# EAGLE board schema_v1 (EAGLE 7.6.0)
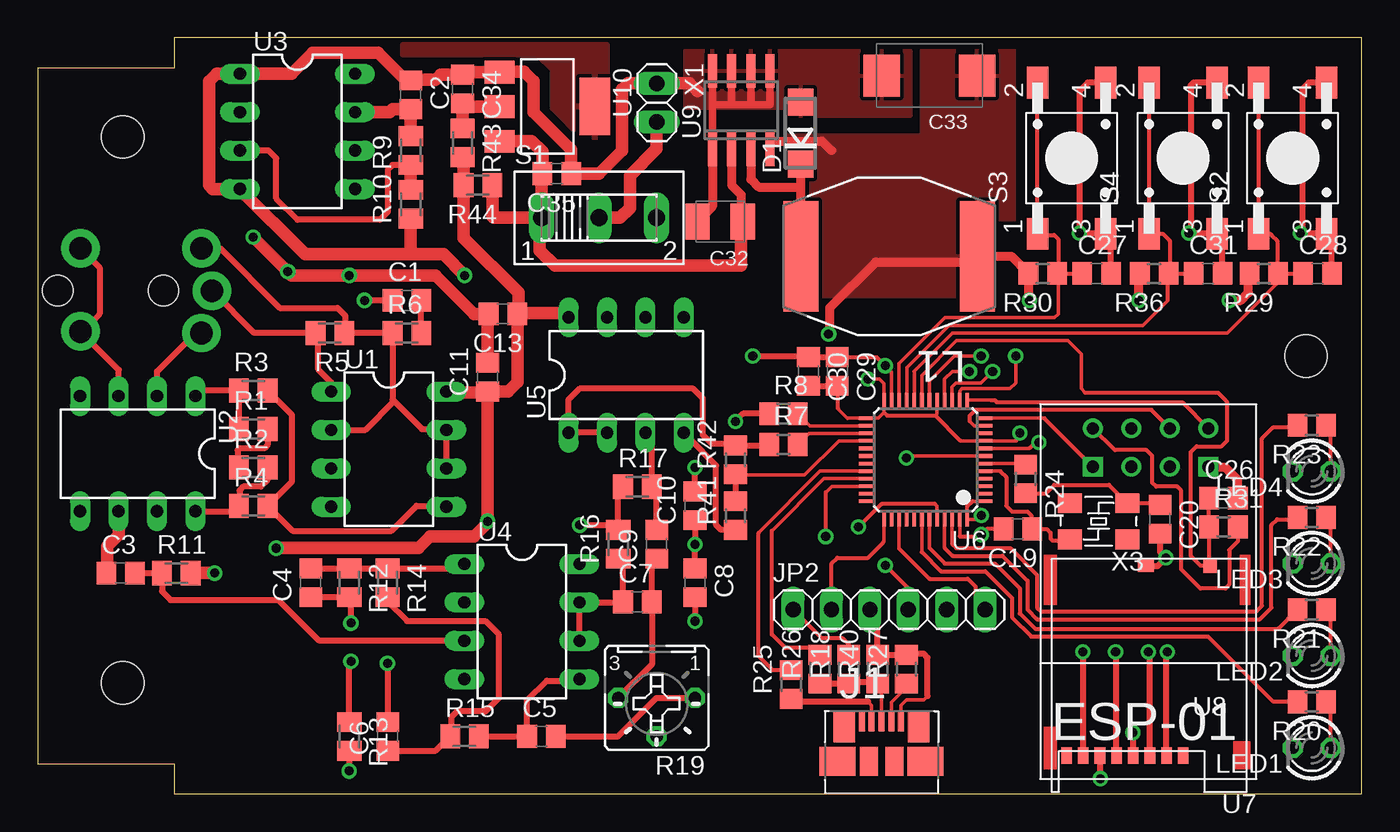
[diagram p0: board, top side]
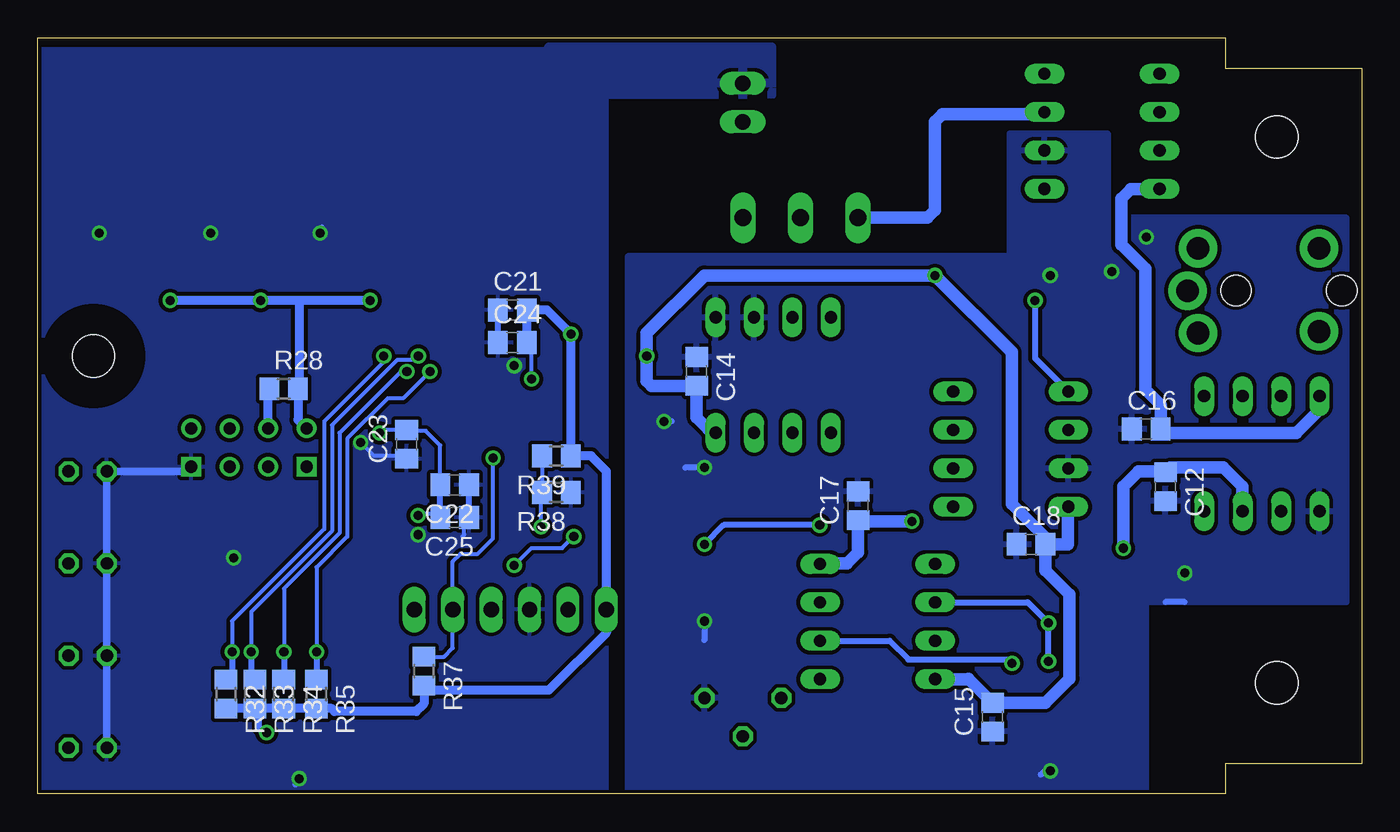
[diagram p1: board, bottom side, seen from below]

Size 87.52 x 50 mm. Coordinates in mm from the lower left corner, seen from the top.
Outline: 0,2 9,2 9,0 87.52,0 87.52,50 9,50 9,48 0,48 0,2
Copper layers (1*16): Top 0.035mm / dielectric 1.5mm / Bottom 0.035mm
Design rules "default *": minimum track width 9mil, minimum drill 6mil, track to track 10mil, track to pad 10mil, pad to pad 10mil, via to via 10mil, smd to smd 10mil, copper to edge 10mil, drill to drill 8mil, minimum pad ring 10mil, minimum via ring 8mil, stop-mask expansion 4mil, vias tented up to drill 0mil, thermal gap 10mil
Holes 2.8 mm at 5.62,43.45 5.62,7.35 83.84,28.96
bRestrict: area 80.8,25.9 to 86.9,32

## Footprints (pad centres in the part's own frame; a part is rotated, then mirrored left to right if it is on the bottom)
C0805 = smd 1.3 x 1.5: 1 -0.95,0; 2 0.95,0
SMC_B = smd 1.6 x 2.4: + -1.5,0; - 1.5,0
SMC_E = smd 2.4 x 2.8: + -3.15,0; - 3.15,0
DO214AC = smd 1.8 x 1.7: A 2.05,0; C -2.05,0
MOLEX_47346-0001 = smd 0.395 x 1.38: 1 -1.3,0; 2 -0.65,0; 3 0,0; 4 0.65,0; 5 1.3,0 | smd 1.4 x 2.1: M1 -2.462,-0.36; M2 2.462,-0.36 | smd 2.375 x 1.9: M3 -2.913,-2.66; M6 2.913,-2.66 | smd 1.175 x 1.9: M4 -0.82,-2.66; M5 0.85,-2.66
1X06 = drill 1.016 long: 1 -6.35,0; 2 -3.81,0; 3 -1.27,0; 4 1.27,0; 5 3.81,0; 6 6.35,0
INDM1410X600N = smd 2.311 x 7.29: 1 -5.842,0; 2 5.842,0
LED3MM = drill 0.813 octagon: A -1.27,0; K 1.27,0
M0805 = smd 1.3 x 1.6: 1 -0.95,0; 2 0.95,0
R0805 = smd 1.3 x 1.5: 1 -0.95,0; 2 0.95,0
B25P = drill 0.813 octagon: A -2.54,0; E 2.54,0; S 0,2.54
255SB = drill 1.118 long: 1 -3.81,0; 2 0,0; 3 3.81,0
TASTER-9314_SMD = smd 2.1 x 1.4: 1 -5,2.25; 2 5,2.25; 3 -5,-2.25; 4 5,-2.25
DIL08 = drill 0.813 long: 1 -3.81,-3.81; 2 -1.27,-3.81; 3 1.27,-3.81; 4 3.81,-3.81; 5 3.81,3.81; 6 1.27,3.81; 7 -1.27,3.81; 8 -3.81,3.81
LQFP48-7X7 = smd 0.9 x 0.24: 1 -3.95,2.75; 2 -3.95,2.25; 3 -3.95,1.75; 4 -3.95,1.25; 5 -3.95,0.75; 6 -3.95,0.25; 7 -3.95,-0.25; 8 -3.95,-0.75; 9 -3.95,-1.25; 10 -3.95,-1.75; 11 -3.95,-2.25; 12 -3.95,-2.75; 25 3.95,-2.75; 26 3.95,-2.25; 27 3.95,-1.75; 28 3.95,-1.25; 29 3.95,-0.75; 30 3.95,-0.25; 31 3.95,0.25; 32 3.95,0.75; 33 3.95,1.25; 34 3.95,1.75; 35 3.95,2.25; 36 3.95,2.75 | smd 0.24 x 0.9: 13 -2.75,-3.95; 14 -2.25,-3.95; 15 -1.75,-3.95; 16 -1.25,-3.95; 17 -0.75,-3.95; 18 -0.25,-3.95; 19 0.25,-3.95; 20 0.75,-3.95; 21 1.25,-3.95; 22 1.75,-3.95; 23 2.25,-3.95; 24 2.75,-3.95; 37 2.75,3.95; 38 2.25,3.95; 39 1.75,3.95; 40 1.25,3.95; 41 0.75,3.95; 42 0.25,3.95; 43 -0.25,3.95; 44 -0.75,3.95; 45 -1.25,3.95; 46 -1.75,3.95; 47 -2.25,3.95; 48 -2.75,3.95
ESP01 = drill 0.8: CH_PD -1.285,-8.178; GPIO0 1.255,-5.638; GPIO2 -1.285,-5.638; RST 1.255,-8.178; TX -3.825,-8.178; VCC 3.795,-8.178 | drill 0.8 square: GND -3.825,-5.638; RX 3.795,-5.638
SD-503398-003 = smd 0.7 x 1.1: 1 0,0; 2 1.1,0; 3 2.2,0; 4 3.3,0; 5 4.4,0; 6 5.5,0; 7 6.6,0; 8 7.7,0 | smd 0.9 x 0.93: 9 -1.79,-12.55 | smd 1.05 x 0.78: 10 2.45,-12.54
SOIC8 = smd 0.6 x 2.2: 1 -1.905,-2.6; 2 -0.635,-2.6; 3 0.635,-2.6; 4 1.905,-2.6; 5 1.905,2.6; 6 0.635,2.6; 7 -0.635,2.6; 8 -1.905,2.6
SOT223 = smd 1.499 x 2.007: 1 -2.261,-3.15; 2 0.025,-3.15; 3 2.311,-3.15 | smd 3.81 x 2.007: 4 0,3.15
1X02 = drill 1.016 long: 1 -1.27,0; 2 1.27,0
MJ-2135 = drill 1.5 pad 2.54: P$1 8.7,2.8; P$2 8,5.6; P$3 8,0; P$4 0,0.1; P$5 0,5.6 | hole 2: 5.5,2.8; -1.5,2.8
IQG5032B = smd 1.6 x 1.3: 1 -1.9,-1.2; 2 1.9,-1.2; 3 1.9,1.2; 4 -1.9,1.2

## Placement (x,y rotation side)
C1  10n  [C0805]  24.4,32.64 0 top
C2  1u  [C0805]  24.65,46.23 270 top
C3  1u  [C0805]  5.48,14.61 0 top
C4  10n  [C0805]  18.05,13.97 90 top
C5  10n  [C0805]  33.29,3.81 0 top
C6  10n  [C0805]  23.13,3.81 90 top
C7  47n  [C0805]  39.64,12.7 0 top
C8  47n  [C0805]  43.45,13.97 270 top
C9  47n  [C0805]  40.91,16.51 90 top
C10  47n  [C0805]  43.45,19.05 90 top
C11  100n  [C0805]  29.73,27.56 90 top
C12  100n  [C0805]  12.97,20.32 270 bottom
C13  100n  [C0805]  30.75,31.75 180 top
C14  100n  [C0805]  43.96,27.94 270 bottom
C15  100n  [C0805]  24.4,5.08 90 bottom
C16  100n  [C0805]  14.24,24.13 0 bottom
C17  100n  [C0805]  33.29,19.05 90 bottom
C18  100n  [C0805]  21.86,16.51 0 bottom
C19  22p  [C0805]  64.79,17.53 180 top
C20  22p  [C0805]  74.18,18.16 270 top
C21  100n  [C0805]  56.15,32 0 bottom
C22  100n  [C0805]  59.96,20.45 180 bottom
C23  100n  [C0805]  63.13,23.11 90 bottom
C24  4.7u  [C0805]  56.15,29.84 0 bottom
C25  4.7u  [C0805]  59.96,18.29 180 bottom
C26  100n  [C0805]  78.38,19.56 0 top
C27  100n  [C0805]  69.99,34.42 0 top
C28  100n  [C0805]  84.6,34.42 0 top
C29  1u  [C0805]  52.85,27.94 270 top
C30  10n  [C0805]  50.94,27.94 270 top
C31  100n  [C0805]  77.36,34.42 0 top
C32  15u  [SMC_B]  45.1,37.85 180 top
C33  220u  [SMC_E]  58.94,47.5 180 top
C34  1u  [C0805]  28.08,46.61 270 top
C35  1u  [C0805]  34.31,41.02 180 top
D1  [DO214AC]  50.44,43.69 90 top
J1  [MOLEX_47346-0001]  55.77,4.83 0 top
JP2  [1X06]  56.28,12.19 0 top
L1  68µH  [INDM1410X600N]  56.28,35.56 180 top
LED1  [LED3MM]  84.22,3.05 180 top
LED2  [LED3MM]  84.22,9.14 180 top
LED3  [LED3MM]  84.22,15.24 180 top
LED4  [LED3MM]  84.22,21.34 180 top
R1  3k  [M0805]  14.24,24.13 0 top
R2  3k  [M0805]  14.24,21.59 0 top
R3  30k  [M0805]  14.24,26.67 0 top
R4  30k  [M0805]  14.24,19.05 0 top
R5  1M  [M0805]  19.32,30.48 180 top
R6  12k  [M0805]  24.4,30.48 0 top
R7  0  [R0805]  49.29,23.11 0 top
R8  0  [R0805]  49.29,25.15 0 top
R9  100k  [M0805]  24.65,42.55 90 top
R10  100k  [M0805]  24.65,38.99 90 top
R11  1M  [M0805]  9.16,14.61 0 top
R12  68k  [M0805]  20.59,13.97 270 top
R13  1k  [M0805]  20.59,3.81 270 top
R14  39k  [M0805]  23.13,13.97 270 top
R15  100k  [M0805]  28.21,3.81 0 top
R16  68k  [M0805]  38.37,16.51 90 top
R17  68k  [M0805]  39.64,20.32 0 top
R18  1.5k  [R0805]  53.61,8.26 90 top
R19  [B25P]  40.91,6.35 180 top
R20  [R0805]  84.22,6.1 180 top
R21  [R0805]  84.22,12.19 180 top
R22  [R0805]  84.22,18.29 180 top
R23  [R0805]  84.22,24.38 180 top
R24  0E  [R0805]  65.29,20.83 270 top
R25  22E  [R0805]  49.8,7.24 90 top
R26  22E  [R0805]  51.7,8.26 90 top
R27  100k  [R0805]  57.42,8.26 90 top
R28  10k  [R0805]  71.26,26.8 0 bottom
R29  10k  [R0805]  81.04,34.42 180 top
R30  10k  [R0805]  66.44,34.42 180 top
R31  10k  [R0805]  78.38,17.65 0 top
R32  10k  [R0805]  75.07,6.6 270 bottom
R33  10k  [R0805]  73.17,6.6 270 bottom
R34  10k  [R0805]  71.26,6.6 270 bottom
R35  10k  [R0805]  69.1,6.6 270 bottom
R36  10k  [R0805]  73.8,34.42 180 top
R37  10k  [R0805]  61.99,8.13 270 bottom
R38  10k  [R0805]  53.23,19.94 180 bottom
R39  10k  [R0805]  53.23,22.35 180 bottom
R40  1.5k  [R0805]  55.52,8.26 90 top
R41  3.3k  [R0805]  46.12,18.41 90 top
R42  6.8k  [R0805]  46.12,22.1 90 top
R43  0  [M0805]  28.08,43.05 270 top
R44  0  [M0805]  29.1,40.26 180 top
S1  [255SB]  37.1,38.1 0 top
S2  [TASTER-9314_SMD]  82.95,42.04 90 top
S3  [TASTER-9314_SMD]  68.34,42.04 90 top
S4  [TASTER-9314_SMD]  75.71,42.04 90 top
U1  LT1112N  [DIL08]  23.2,22.8 270 top
U2  LT1167A  [DIL08]  6.6,22.5 180 top
U3  BUF634PDIL08  [DIL08]  17.16,43.81 270 top
U4  LT1112N  [DIL08]  32,11.4 270 top
U5  LT1112N  [DIL08]  38.9,27.7 0 top
U6  STM32F373CCT6LQFP48-7X7  [LQFP48-7X7]  58.69,22.1 180 top
U7  ESP01  [ESP01]  73.55,16 180 top
U8  MICROSD  [SD-503398-003]  75.71,2.54 180 top
U9  MIC4680-3.3YM  [SOIC8]  46.5,45.21 0 top
U10  REG1117  [SOT223]  33.67,45.47 270 top
X1  [1X02]  40.91,45.72 270 top
X2  MJ2135  [MJ-2135]  2.81,30.48 0 top
X3  ABM3B  [IQG5032B]  70.12,18.03 180 top

## Library data of the parts
C1-C31 C34 C35 R1-R18 R20-R44 = resistor
C32 C33 = rcl
D1 = diode
J1 = pro3E; MPN: 47346-0001; OC_FARNELL: 1568026; OC_NEWARK: 47M0505; PACKAGE: 5 POS MICRO USB R/A; SUPPLIER: MOLEX
JP2 = pinhead
L1 = pro3E; CURRENTRATING: 1.5A; MPN: UP2B-680-R; OC_FARNELL: 1463537; OC_NEWARK: 29K6281; PACKAGE: SMD; SUPPLIER: Coiltronics; TOLERANCE: ±20%
LED1-LED4 = led
R19 = pot
S1 = switch
S2-S4 U1-U6 U8 X1-X3 = pro3E
U7 = esp8266modules
U9 = pro3E; MF: MICROCHIP; MPN: MIC4680-3.3YM; OC_FARNELL: 2510172; OC_NEWARK: MIC4680-3.3YM
U10 = pro3E; MPN: REG1117; OC_FARNELL: 1097566; OC_NEWARK: 14P6981

## Nets
+3V3: C21.2 C22.2 C23.2 C24.2 C25.2 C29.2 C30.2 C33.+ JP2.1 L1.1 R18.2 R28.2 R29.2 R30.2 R31.2 R32.2 R33.2 R34.2 R35.2 R36.2 R37.2 R39.1 U6.1 U6.9 U6.17 U6.24 U6.25 U6.48 U7.VCC U8.4 U9.4
/RST: JP2.5 R37.1 U6.7
ADC: R41.2 R42.1 U6.28
DRIVEN_LEG: C1.1 R5.2 U1.1 X2.P$1
EKG_SIGNAL: R7.1 R42.2 U5.1 U5.2
ESP_PD: U6.11 U7.CH_PD
ESP_RX: U6.12 U7.RX
ESP_TX: U6.13 U7.TX
LEDG: R20.2 U6.42
LEDM: R22.2 U6.45
LEDR: R23.2 U6.46
LEDW: R21.2 U6.43
N$1: R1.1 R3.1 U2.1
N$2: C8.1 C10.1 R16.2 R17.1
N$3: R1.2 R2.1
N$4: R7.2 U6.27
N$6: R9.1 R10.2 U3.3
N$7: C1.2 R6.2
N$8: R8.2 U6.26
N$9: U2.2 X2.P$3
N$10: U2.3 X2.P$4 X2.P$5
N$11: LED1.A R20.1
N$12: C3.1 U2.6
N$13: C3.2 R11.1 U4.3
N$14: R2.2 R4.1 U2.8
N$15: LED2.A R21.1
N$16: C6.2 C7.1 R16.1 U4.6 U4.7
N$17: C4.2 R12.1 R14.1 U4.1
N$18: R3.2 R4.2 U1.5
N$19: S1.2 X1.2
N$20: C6.1 R14.2 R15.1
N$21: C5.1 R15.2 U4.5
N$22: LED3.A R22.1
N$24: C9.2 R17.2 U5.3
N$25: C7.2 C9.1 R19.E
N$26: LED4.A R23.1
N$27: J1.4 R27.1
N$28: J1.3 R18.1 R26.1 R40.1
N$29: J1.2 R25.1
N$30: R28.1 U7.RST
N$31: U7.GPIO2
N$32: U7.GPIO0
N$33: C20.1 R24.2 X3.1
N$35: R38.2 R39.2 U6.44
N$36: D1.C L1.2 U9.3
N$38: C34.2 R43.1 U10.2
N$39: U10.4
N$40: C4.1 R12.2 R13.1 U4.2
OSC_IN: C19.1 U6.5 X3.3
OSC_OUT: R24.1 U6.6
SD_MISO: R35.1 U6.16 U8.7
SD_MOSI: R33.1 U6.18 U8.3
SD_NSS: R32.1 U6.14 U8.2
SD_SCK: R34.1 U6.15 U8.5
SD_SWITCH: C26.1 R31.1 U6.19 U8.9
SHIELD: R5.1 R6.1 U1.2 U1.6 U1.7 X2.P$2
SWCLK: JP2.2 U6.37
SWDAT: JP2.4 U6.34
SWO: JP2.6 U6.39
T_START: C28.1 R29.1 S2.1 S2.2 U6.20
T_STARTLONG: C31.1 R36.1 S4.1 S4.2 U6.21
T_WPS: C27.1 R30.1 S3.1 S3.2 U6.22
USB_DM: R25.2 U6.32
USB_DP: R26.2 U6.33
V+: C11.1 C12.1 C13.1 C17.1 R43.2 R44.2 U1.8 U2.7 U4.8 U5.8
V-: C2.1 C14.2 C15.2 C16.2 C18.2 C19.2 C20.2 C21.1 C22.1 C23.1 C24.1 C25.1 C26.2 C27.2 C28.2 C29.1 C30.1 C31.2 C32.- C33.- C34.1 C35.1 D1.A J1.5 JP2.3 LED1.K LED2.K LED3.K LED4.K R10.1 R27.2 R38.1 R40.2 R41.1 S2.3 S2.4 S3.3 S3.4 S4.3 S4.4 U1.4 U2.4 U3.1 U3.4 U4.4 U5.4 U6.8 U6.23 U6.47 U7.GND U8.6 U8.10 U9.1 U9.5 U9.6 U9.7 U9.8 U10.1 X1.1
VBAT: C2.2 C32.+ C35.2 R9.2 R44.1 S1.1 U3.7 U9.2 U10.3
VGND: C5.2 C8.2 C10.2 C11.2 C12.2 C13.2 C14.1 C15.1 C16.1 C17.2 C18.1 R8.1 R11.2 R13.2 R19.A U1.3 U2.5 U3.6 U5.5 U5.6

## Tracks (layer width: path | path; a pad name or v marks a point on that pad's centre or on a via)
+3V3  (via drill 0.6)
  Top 0.229: v54.88,27.43 55.64,27.43 55.95,27.13 U6.24 55.94,25.23 55.95,25.22 55.57,24.85 U6.25 53.54,24.85 53.53,24.84 52.91,25.47 | 61,23.34 U6.9 64.64,23.35 64.66,23.37 | v62.37,18.41 62.11,18.15 U6.48 61.43,19 | 61.79,19.36 U6.1 | U6.17 59.44,25.13 59.33,25.02
  Top 0.254: 61.43,19 61.79,19.36 | v64.91,23.88 64.91,23.62 64.66,23.37 | 61,23.34 59.33,25.02 56.15,25.02 55.95,25.22 | R31.2 79.33,16.7 78.76,16.13 78.76,13.84 78.5,13.59 76.85,13.59 75.58,14.86 75.58,20.07 75.33,20.32 73.93,20.32 73.68,20.57 73.68,22.35 73.3,22.73 71.2,22.73 U7.VCC | R18.2 53.61,9.91 53.23,10.29 51.83,10.29 JP2.1 | 52.91,25.47 52.91,26.93 C29.2
  Top 0.406: C30.2 C29.2 | U8.4 72.41,4.05 v72.39,4.06
  Top 0.61: v65.55,32.64 65.49,32.7 R30.2 64.34,35.56 L1.1 61.74,35.18 55.39,35.18 52.34,32.13 52.34,30.48 v52.28,30.42 | v78.76,32.64 79.52,32.64 80.03,33.15 80.03,34.35 R29.2 | v72.79,32.64 72.79,34.35 R36.2 | U9.4 48.4,43.18 51.83,43.18 52.47,42.55
  Bottom 0.229: 64.85,24.06 64.85,23.94 v64.91,23.88
  Bottom 0.254: 64.85,24.06 C23.2 63.07,24 61.87,24 60.91,23.05 C22.2 | v62.37,18.41 62.37,18.54 61.16,18.54 C25.2 61.04,18.41 | v54.88,27.43 54.88,29.52 C24.2
  Bottom 0.406: C25.2 C22.2 | v72.39,4.06 72.64,4.06 72.9,4.32 72.9,5.38 R33.2
  Bottom 0.61: 65.67,32.51 v65.55,32.64 70.25,32.64 | 70.26,26.85 R28.2 | R28.2 70.31,24.74 U7.VCC | 70.25,32.64 70.25,26.86 R28.2 | v78.76,32.64 v72.79,32.64 70.25,32.64 | C24.2 C21.2 53.86,32 v52.28,30.42 R39.1 50.94,22.35 49.93,21.34 JP2.1 49.93,10.67 53.74,6.86 61.67,6.86 R37.2 61.99,5.97 62.5,5.46 67.89,5.46 68.09,5.65 R35.2 R34.2 R33.2 R32.2
  pour Top: 49.55,43.56 58.44,43.56 58.44,49.15 64.53,49.15 64.53,37.97 63.13,37.97 63.13,32.89 49.55,32.89
/RST  (via drill 0.6)
  Top 0.229: U6.7 57.54,22.35 v57.42,22.23
  Top 0.254: 57.55,22.35 v57.42,22.23
  Bottom 0.254: v57.42,22.23 57.42,16.89 58.44,15.88 59.58,15.88 60.09,15.37 JP2.5 60.09,9.65 60.66,9.08 R37.1
ADC
  Top 0.229: U6.28 52.95,23.35 50.69,21.08 46.18,21.08 R42.1
  Top 0.406: R42.1 R41.2
DRIVEN_LEG  (via drill 0.6)
  Top 0.406: X2.P$1 14.31,30.48 R5.2 18.54,30.31 18.54,28.07 19.39,27.22 U1.1 | C1.1 v21.59,32.64
  Bottom 0.406: v21.59,32.64 21.59,28.81 U1.1
EKG_SIGNAL
  Top 0.406: R7.1 48.28,23.05 R42.2 45.98,23.18 44.53,23.18 43.96,23.75 43.96,26.16 43.32,26.8 35.81,26.8 35.05,26.04 35.05,23.93 U5.1 U5.2
ESP_PD
  Top 0.229: 61.61,24.64 61.9,24.35 U6.11
  Top 0.254: 61.61,24.64 61.61,25.02 61.99,25.4 73.61,25.4 U7.CH_PD
ESP_RX
  Top 0.229: U6.12 66.55,24.85 66.55,24.84
  Top 0.254: 66.55,24.84 U7.RX
ESP_TX
  Top 0.229: U6.13 62.99,26.05 63.01,26.04
  Top 0.254: 63.01,26.04 63.26,26.04 63.39,25.91 75.64,25.91 U7.TX
LEDG
  Top 0.229: U6.42 58.44,16.01 58.44,16
  Top 0.254: 58.44,16 59.71,14.73 62.63,14.73 64.41,12.95 64.41,11.68 65.67,10.41 77.36,10.41 81.68,6.1 R20.2
LEDM
  Top 0.229: U6.45 59.94,16.29 59.94,16.28
  Top 0.254: R22.2 83.14,18.16 81.93,18.16 81.55,17.78 81.55,12.32 80.79,11.56 66.06,11.56 65.42,12.19 65.42,14.1 63.77,15.75 60.47,15.75 59.94,16.28
LEDR
  Top 0.229: U6.46 60.44,16.54
  Top 0.254: R23.2 83.14,24.26 81.68,24.26 80.92,23.5 80.92,12.45 80.53,12.06 66.31,12.06 66.06,12.32 66.06,14.48 64.28,16.26 60.72,16.26 60.44,16.54
LEDW
  Top 0.229: U6.43 58.94,16.26
  Top 0.254: R21.2 82,10.92 65.93,10.92 64.91,11.94 64.91,13.59 63.26,15.24 59.96,15.24 58.94,16.26
N$1
  Top 0.406: U2.1 10.41,26.67 R3.1 R1.1
N$2  (via drill 0.6)
  Top 0.406: R17.1 38.37,20 R16.2 38.05,17.78 v35.83,17.78 | C8.1 v43.45,16.51 C10.1
  Bottom 0.406: v35.83,17.78 42.18,17.78 v43.45,16.51
N$3
  Top 0.406: R1.2 15.19,23.06 14.99,22.86 13.34,22.86 13.21,22.73 13.21,21.67 R2.1
N$4
  Top 0.229: U6.27 50.98,23.85 R7.2
N$6
  Top 0.406: R9.1 23.45,41.59 23.13,41.27 23.13,38.48 22.62,37.97 17.16,37.97 15.76,39.37 15.76,42.04 15.26,42.55 U3.3
  Top 0.813: R9.1 R10.2
N$7
  Top 0.406: R6.2 C1.2
N$8
  Top 0.229: U6.26 51.04,24.35 R8.2
N$9
  Top 0.406: X2.P$3 10.43,30.48 7.89,27.94 7.87,27.94 U2.2
N$10
  Top 0.406: X2.P$5 4.08,34.81 4.08,31.75 2.91,30.58 X2.P$4 5.35,28.04 5.33,28.04 U2.3
N$11
  Top 0.254: LED1.A 85.49,5.78 R20.1
N$12
  Top 0.813: C3.1 4.59,14.67 4.59,16.38 5.35,17.14 5.35,18.67 U2.6
N$13
  Top 0.406: C3.2 R11.1 8.21,13.4 8.78,12.83 15.89,12.83 18.56,10.16 28.16,10.16 U4.3
N$14
  Top 0.406: R2.2 15.19,20.78 14.73,20.32 13.59,20.32 13.34,20.07 13.34,19.09 R4.1 12.93,18.69 U2.8
N$15
  Top 0.254: LED2.A 85.49,11.87 R21.1
N$16  (via drill 0.6)
  Top 0.406: U4.6 U4.7 38.66,12.67 C7.1 38.69,15.24 R16.1 | v23.11,8.64 23.11,4.78 C6.2
  Bottom 0.406: U4.6 31.21,10.13 29.97,8.89 23.37,8.89 v23.11,8.64
N$17
  Top 0.406: C4.2 R12.1 R14.1 27.9,14.92 U4.1
N$18
  Top 0.406: R3.2 16.78,25.08 16.78,20.64 R4.2 | R4.2 15.51,19.05 | R4.2 16.84,17.4 23.38,17.4 25.04,19.05 26.95,19.05 U1.5
N$19
  Top 0.813: S1.2 38.5,38.1 39.13,38.73 39.13,40.89 40.91,42.67 X1.2
N$20
  Top 0.406: C6.1 26.31,2.86 R15.1 27.32,3.87 27.32,5.08 27.7,5.46 29.59,5.46 30.48,6.35 30.48,10.54 29.59,11.43 24.4,11.43 23.13,12.7 R14.2
N$21
  Top 0.406: R15.2 C5.1 32.34,6.18 33.66,7.49 35.71,7.49 U4.5
N$22
  Top 0.254: LED3.A 85.49,17.78 85.61,17.91 85.55,17.91 R22.1
N$24
  Top 0.406: C9.2 40.91,20 R17.2 40.59,23.47 U5.3
N$25
  Top 0.406: C9.1 40.59,15.24 C7.2 40.59,8.57 R19.E
N$26
  Top 0.254: LED4.A 85.49,24.06 R23.1
N$27
  Top 0.229: J1.4 56.42,6.05 57.42,7.05
  Top 0.406: 57.42,7.05 R27.1
N$28
  Top 0.229: 55.77,7.05 J1.3 55.77,7.11
  Top 0.406: 55.77,7.05 R40.1 | 55.77,7.11 55.52,7.37 53.67,7.37 R18.1 R26.1
N$29
  Top 0.229: J1.2 55.12,5.86 54.88,6.1
  Top 0.406: 54.88,6.1 50.18,6.1 49.8,6.48 R25.1
N$30
  Bottom 0.61: U7.RST 72.29,26.72 R28.1
N$33
  Top 0.254: R24.2 66.63,19.88 67.2,20.45 70.81,20.45 X3.1 74.06,19.23 C20.1
N$35  (via drill 0.6)
  Top 0.229: 59.45,19.05 59.44,19.06 | U6.44 59.44,19.06 | 59.44,19.06 59.33,19.18
  Top 0.254: 59.33,19.18 55.77,19.18 v54.24,17.65
  Bottom 0.254: R39.2 R38.2 54.24,19.87 v54.24,17.65
N$36
  Top 0.61: U9.3 47.13,40.64 47.64,40.13 50.44,40.13 | 50.44,40.13 D1.C | L1.2 50.44,40.13
N$38
  Top 0.813: R43.1 C34.2 28.3,45.44 U10.2
N$39
  pour Top: 37.61,49.53 37.61,43.43 35.96,43.43 34.05,45.34 34.05,47.88 33.04,48.9 24.15,48.9 24.15,49.53
N$40  (via drill 0.6)
  Top 0.406: C4.1 R12.2 20.7,12.91 v20.7,11.3 | R13.1 20.59,8.65 v20.7,8.76
  Bottom 0.406: v20.7,8.76 v20.7,11.3 22.07,12.67 U4.2
OSC_IN
  Top 0.229: U6.5 63.63,21.35 63.64,21.34
  Top 0.254: 63.64,21.34 64.02,20.95 64.02,19.05 64.41,18.67 65.42,18.67 65.67,18.41 65.67,17.59 C19.1 66.69,17.53 66.94,17.27 66.94,16.89 67.07,16.76 68.15,16.76 X3.3
OSC_OUT
  Top 0.229: U6.6 65.22,21.85 R24.1
  Top 0.254: 65.23,21.84 R24.1
SD_MISO  (via drill 0.6)
  Top 0.229: v61.59,27.94 60.45,27.94 59.94,27.43 U6.16
  Top 0.406: U8.7 69.11,9.38 v69.09,9.4
  Bottom 0.254: v61.59,27.94 63.37,26.16 64.39,26.16 67.06,23.5 67.06,17.02 69.09,14.99 v69.09,9.4
  Bottom 0.406: 69.09,7.54 R35.1 69.09,7.57 v69.09,9.4
SD_MOSI  (via drill 0.6)
  Top 0.229: v62.36,28.96 60.58,28.96 58.93,27.3 58.93,26.06 U6.18
  Top 0.406: U8.3 73.51,9.3 v73.41,9.4
  Bottom 0.254: v62.36,28.96 62.61,28.7 63.75,28.7 68.07,24.38 68.07,17.39 73.41,12.05 v73.41,9.4
  Bottom 0.406: v73.41,9.4 73.41,7.79 R33.1
SD_NSS  (via drill 0.6)
  Top 0.229: U6.14 60.94,26.65 61.09,26.8 64.26,26.8 64.64,27.18 v64.64,28.96
  Top 0.406: U8.2 74.61,9.33 v74.68,9.4
  Bottom 0.254: v64.64,28.96 64.64,28.57 68.58,24.64 68.58,17.53 74.68,11.43 v74.68,9.4
  Bottom 0.406: v74.68,9.4 74.68,7.95 R32.1
SD_SCK  (via drill 0.6)
  Top 0.229: U6.15 60.44,26.91 60.71,27.18 62.36,27.18 v63.12,27.94
  Top 0.406: U8.5 71.31,9.34 v71.25,9.4
  Bottom 0.254: 63.37,27.94 v63.12,27.94 63.5,27.94 67.56,23.88 67.56,17.26 71.25,13.58 v71.25,9.4
  Bottom 0.406: v71.25,9.4 71.25,7.57 R34.1
SD_SWITCH
  Top 0.229: 69.23,26.54 68.98,26.8 68.98,29.08 68.09,29.97 60.72,29.97 58.44,27.69 58.44,27.68 U6.19
  Top 0.254: C26.1 R31.1 77.42,15.16 U8.9 76.87,15.09 76.22,15.75 76.22,22.61 76.6,22.99 78.25,22.99 78.63,23.37 78.63,25.91 77.99,26.54 69.23,26.54
SHIELD
  Top 0.406: U1.6 U1.7 26.95,24.13 25.4,24.13 23.56,25.97 | 23.56,25.97 23.45,26.08 R6.1 R5.1 20.32,30.53 20.32,31.62 19.81,32.13 16,32.13 12.05,36.08 X2.P$2 | U1.2 21.66,24.07 23.56,25.97
SWCLK
  Top 0.229: U6.37 55.94,16.68 55.9,16.64
  Top 0.254: JP2.2 52.47,15.24 52.85,15.62 54.88,15.62 55.9,16.64
SWDAT  (via drill 0.6)
  Top 0.229: 52.09,19.94 52.49,20.35 U6.34
  Top 0.254: JP2.4 57.55,13.59 v56.02,15.11 | v52.09,17.02 52.09,19.94
  Bottom 0.254: v56.02,15.11 54.88,16.26 52.85,16.26 v52.09,17.02
SWO
  Top 0.229: U6.39 56.94,16.23
  Top 0.254: 56.94,16.23 58.94,14.22 61.48,14.22 61.99,13.72 61.99,12.83 JP2.6
T_START
  Top 0.229: 81.93,33.78 78.63,30.48 60.47,30.48 57.93,27.94 57.94,27.93 U6.20
  Top 0.254: 80.65,37.08 S2.1 | S2.1 81.36,37.04 arc-45 81.54,36.96 81.93,36.58 81.93,34.56 | 81.93,34.56 arc45 R29.1 C28.1 | S2.2 S2.1 | 81.93,33.78 81.93,34.56
T_STARTLONG
  Top 0.229: 74.69,32.64 73.04,30.99 60.21,30.99 57.44,28.21 U6.21
  Top 0.254: 73.41,37.08 S4.1 | 74.69,32.64 74.69,34.36 R36.1 | 74.82,34.58 arc-45 R36.1 | R36.1 C31.1 | S4.1 74.36,37.04 74.82,36.58 74.82,34.48 R36.1 | S4.2 S4.1
T_WPS
  Top 0.229: 67.45,34.35 67.45,31.75 67.2,31.5 59.96,31.5 56.94,28.47 U6.22
  Top 0.254: 67.45,34.58 arc-45 R30.1 | R30.1 C27.1 | R30.1 67.45,34.48 67.45,36.7 67.2,36.96 66.01,36.96 S3.1 S3.2 | 67.45,34.35 R30.1
USB_DM
  Top 0.229: 47.64,17.27 51.72,21.35 U6.32
  Top 0.254: 47.64,17.27 47.64,9.14 48.6,8.19 R25.2 49.73,8.26
USB_DP
  Top 0.229: 48.53,17.4 51.98,20.85 51.99,20.85 U6.33
  Top 0.254: R26.2 51.64,9.21 51.2,9.65 49.42,9.65 48.53,10.54 48.53,17.4
V+  (via drill 0.6)
  Top 0.229: 27.07,26.54 U1.8
  Top 0.813: 31.77,31.82 31.77,33.15 28.15,36.76 R44.2 28.15,42.04 R43.2 | 31.77,31.82 C13.1 31.7,27.24 31.07,26.61 C11.1 29.73,26.54 | 29.67,26.48 29.73,26.54 | 29.73,26.54 v29.73,18.03 29.73,17.91 28.84,17.02 25.92,17.02 25.16,16.26 v15.76,16.26 | 29.73,26.54 27.07,26.54 | 31.77,31.82 34.78,31.82 U5.8
  Bottom 0.406: 12.65,21.59 C12.1 12.97,21.59
  Bottom 0.813: v29.73,18.03 33.22,18.03 C17.1 33.29,15.99 34.04,15.24 35.78,15.24 U4.8 | v15.76,16.26 15.76,20.32 14.75,21.34 13.04,21.34 C12.1 | 12.65,21.59 9.16,21.59 7.89,20.32 7.89,18.71 U2.7
V-  (via drill 0.6)
  Top 0.229: 58.82,6.48 58.56,6.22 57.42,6.22 57.07,5.87 J1.5 | v56.02,28.32 56.44,27.9 U6.23 | U6.8 65.54,22.85 65.55,22.86 | U6.47 60.94,17.05 60.95,17.04
  Top 0.254: v66.18,23.24 65.93,23.24 65.55,22.86 | C29.1 55.45,28.89 v56.02,28.32 | C19.2 62.75,17.53 v62.37,17.14 62.25,17.02 60.98,17.02 60.95,17.04
  Top 0.406: 58.82,6.48 58.82,9.02 58.56,9.27 57.49,9.27 R27.2 R40.2 55.52,11.68 JP2.3 | U8.10 74.02,15.08 v74.56,15.62 74.18,16 C20.2 | C27.2 70.94,36.69 S3.3 68.9,37.04 v68.85,37.08 68.85,46.48 69.41,47.04 S3.4 | C31.2 78.31,36.69 S4.3 76.14,37.04 v76.09,37.08 76.22,37.21 76.22,46.86 76.39,47.04 S4.4 | C28.2 85.55,36.69 S2.3 83.5,37.04 v83.45,37.08 83.58,37.21 83.58,46.61 84.01,47.04 S2.4 | R41.1 45.16,17.46 44.85,17.78 44.85,21.72 43.07,23.5 42.81,23.5 42.81,23.79 U5.4 | C30.1 C29.1 | v47.26,28.96 50.82,28.96 | U8.6 70.21,1.04 v70.23,1.02
  Top 0.508: U9.8 44.59,45.59 | 44.59,45.59 U9.1 | U9.5 48.4,45.59 47.13,45.59 | 47.13,45.59 45.86,45.59 | 45.86,45.59 44.59,45.59 | U9.7 45.86,45.59 | U9.6 47.13,45.59
  Top 0.61: U9.1 44.59,38.84 C32.- | C26.2 79.33,20.77 78.5,21.59 77.42,21.59 U7.GND
  Top 0.813: 24.65,35.69 17.67,35.69 U3.4 11.57,40.01 11.32,40.26 11.32,47.12 11.83,47.62 U3.1 16.78,47.62 18.18,49.02 22.5,49.02 24.34,47.18 C2.1 24.72,47.24 26.3,47.24 26.62,47.56 C34.1 28.25,47.73 30.5,47.73 30.5,47.75 | 24.65,35.69 26.81,35.69 v28.21,34.29 | R10.1 24.65,35.69 | 30.75,47.75 32.15,47.75 32.78,47.12 32.78,45.09 35.26,42.61 C35.1 37.1,41.02 38.62,42.55 38.62,46.61 39.01,46.99 X1.1 43.07,46.99 43.6,46.46 | 30.75,47.75 30.55,47.75 | 50.82,28.96 50.88,28.96 C30.1 | U10.1 30.73,47.73 30.75,47.75
  Bottom 0.229: U2.4 2.81,26.29 2.81,25.4
  Bottom 0.254: 59.45,17.02 59.33,17.14 59.33,17.97 C25.1 | 62.95,22.35 65.29,22.35 v66.18,23.24
  Bottom 0.406: C18.2 20.59,16.51 | C24.1 C21.1 | C25.1 C22.1 | 62.95,22.35 C23.1 | v74.56,15.62 74.56,15.75 74.69,15.88 | v68.85,37.08 68.85,37.34 68.72,37.47 | v76.09,37.08 76.09,37.34 | v83.45,37.08 83.45,37.21 83.33,37.34 | v70.23,1.02 70.23,0.89 70.48,0.64
  Bottom 0.508: LED1.K LED2.K LED3.K LED4.K 77.68,21.34 U7.GND
  Bottom 0.813: 2.81,25.4 4.33,23.88 13.22,23.88 13.22,24.13 C16.2 13.29,25.72 14.31,26.74 14.31,34.74 15.89,36.32 15.89,39.37 15.26,40.01 U3.4 13.48,40.13 | 20.84,16.58 20.84,16.89 23.13,19.18 23.13,29.21 v28.21,34.29 43.45,34.29 47.26,30.48 v47.26,28.96 47.26,27.3 46.95,26.99 C14.2 43.96,24.89 43.2,24.13 42.95,24.13 U5.4 | 20.78,16.64 20.84,16.58 | 20.84,16.58 C18.2 | C18.2 20.91,14.8 19.32,13.21 19.32,7.62 20.91,6.03 C15.2 25.99,7.62 26.02,7.59 U4.4 | U1.4 19.43,18.95 19.43,16.51 C18.2
  pour Top: 42.81,49.15 57.67,49.15 57.67,44.83 49.42,44.83 49.42,45.34 42.81,45.34
  pour Bottom: 87.39,0.25 87.39,49.28 50.18,49.28 49.93,49.02 49.93,0.25
  pour Bottom: 39.01,49.4 39.01,46.23 53.74,46.23 53.74,49.4
VBAT
  Top 0.508: 46.5,37.95 C32.+
  Top 0.61: 46.5,37.95 46.5,39.62 45.86,40.26 U9.2
  Top 0.813: S1.1 33.29,40.95 C35.2 33.36,42.48 32.66,43.18 30.75,43.18 | 30.75,43.18 30.55,43.18 | 24.15,45.28 C2.2 R9.2 | 24.15,45.28 23.45,45.28 23.26,45.09 U3.7 | S1.1 30.11,38.1 30.05,38.17 R44.1 | 24.21,45.34 24.15,45.28 | 46.5,37.95 46.5,34.92 34.18,34.92 33.16,35.94 33.16,37.97 S1.1 | U10.3 30.73,43.16 30.75,43.18
  Bottom 0.813: S1.1 28.72,38.1 28.21,38.61 28.21,44.45 27.7,44.96 21.1,44.96 U3.7
VGND  (via drill 0.6)
  Top 0.406: C10.2 v43.45,21.59 | C8.2 v43.45,11.43 | R8.1 46.62,25.15 v46.12,24.64 | R13.2 20.59,1.54 v20.57,1.52 | C5.2 38.35,3.81 40.89,6.35 R19.A
  Top 0.813: v14.24,36.83 v16.53,34.54 16.78,34.29 v20.59,34.29 26.3,34.29 28.84,31.75 C13.2 29.73,31.68 C11.2 | R11.2 v11.7,14.61
  Bottom 0.406: 11.7,12.7 12.97,12.7 | v43.45,21.59 44.72,21.59 | v43.45,11.43 43.45,10.16 | v46.12,24.64 45.61,24.64 | v20.57,1.52 20.95,1.52 21.21,1.27
  pour Bottom: 1,38.1 16.78,38.1 16.78,35.56 48.53,35.56 48.53,0 14.24,0 14.24,12.7 1,12.7
  pour Bottom: 16.78,43.69 16.78,35.43 23.26,35.43 23.26,43.69